# Altium PCB PCB1_DEC22.pcbdoc (part 1 of 2)
Units mil, origin at the board's own origin, x right, y up, seen from the top; angles counter-clockwise.
Board outline 3265 x 2215 mil, 2 copper layers (Top Layer, Bottom Layer); 80 components, 60 nets, 287 pads, 93 vias.
Unrouted connection lines stored in the file: 5.
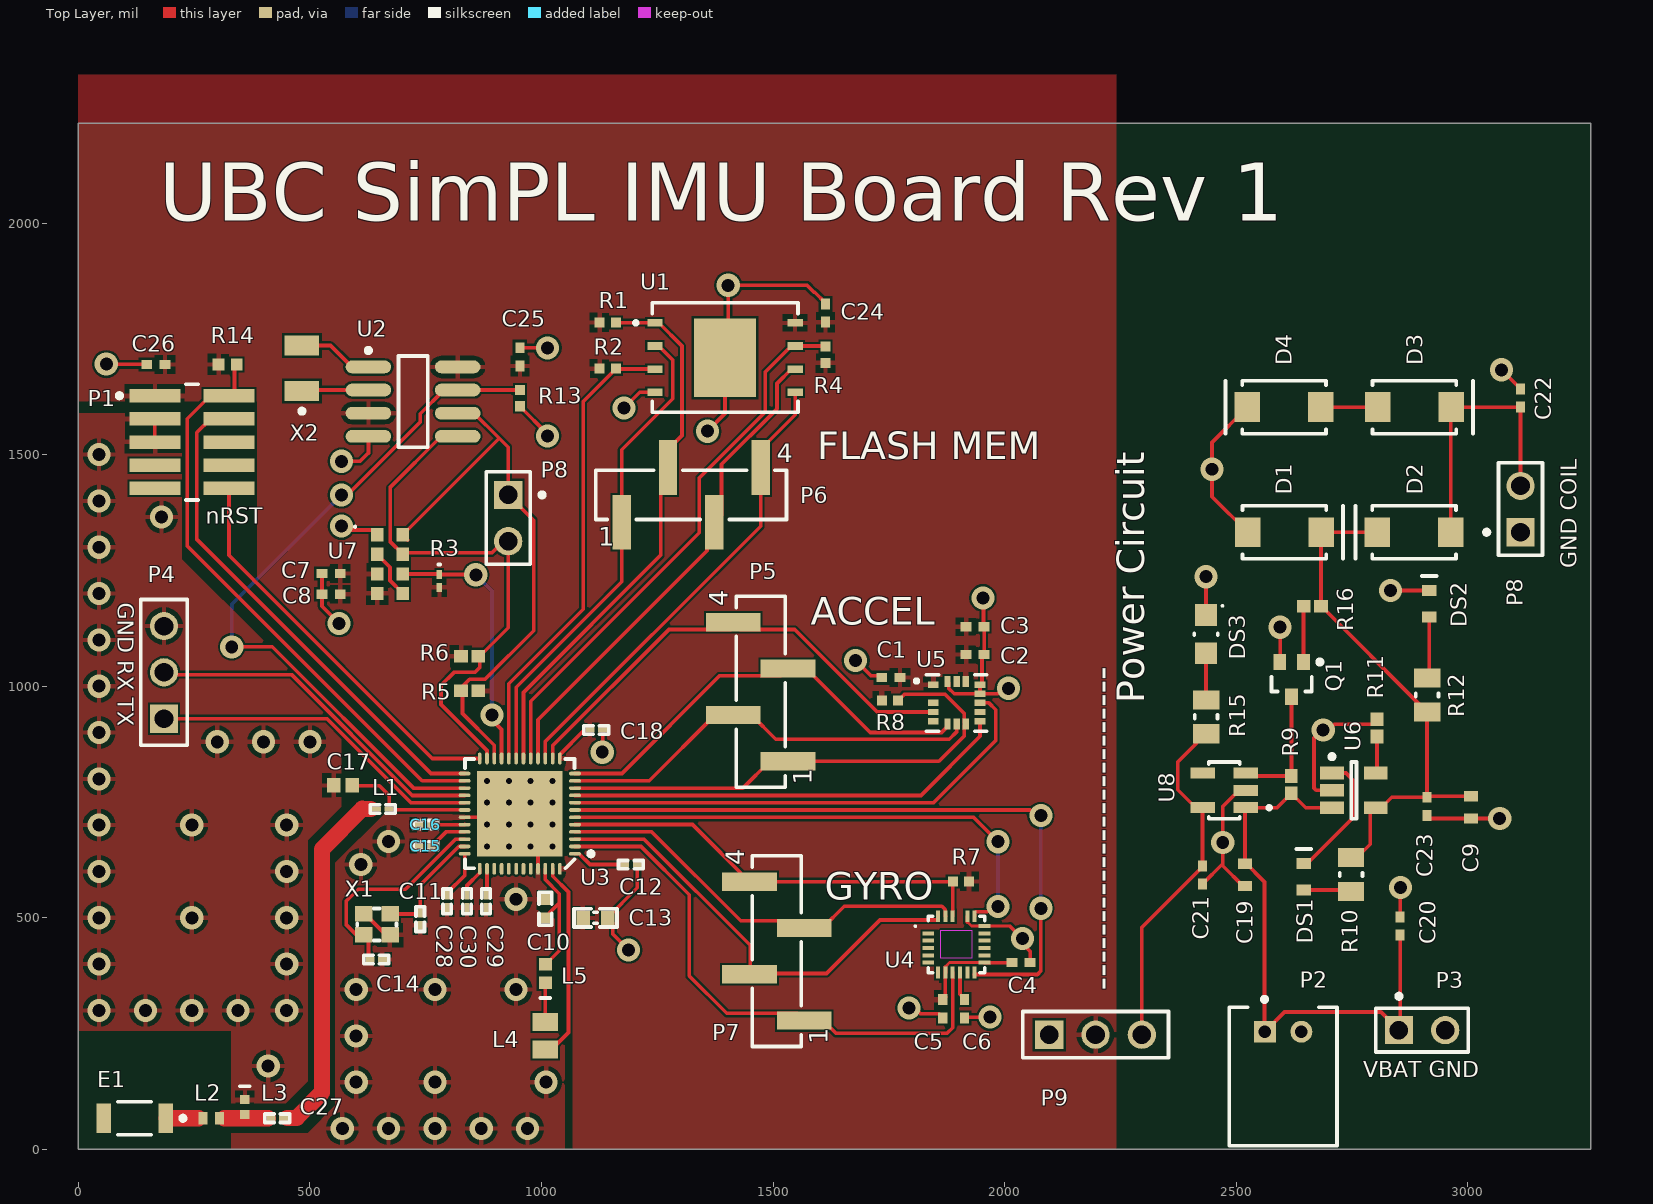
[diagram p0: Top Layer view]
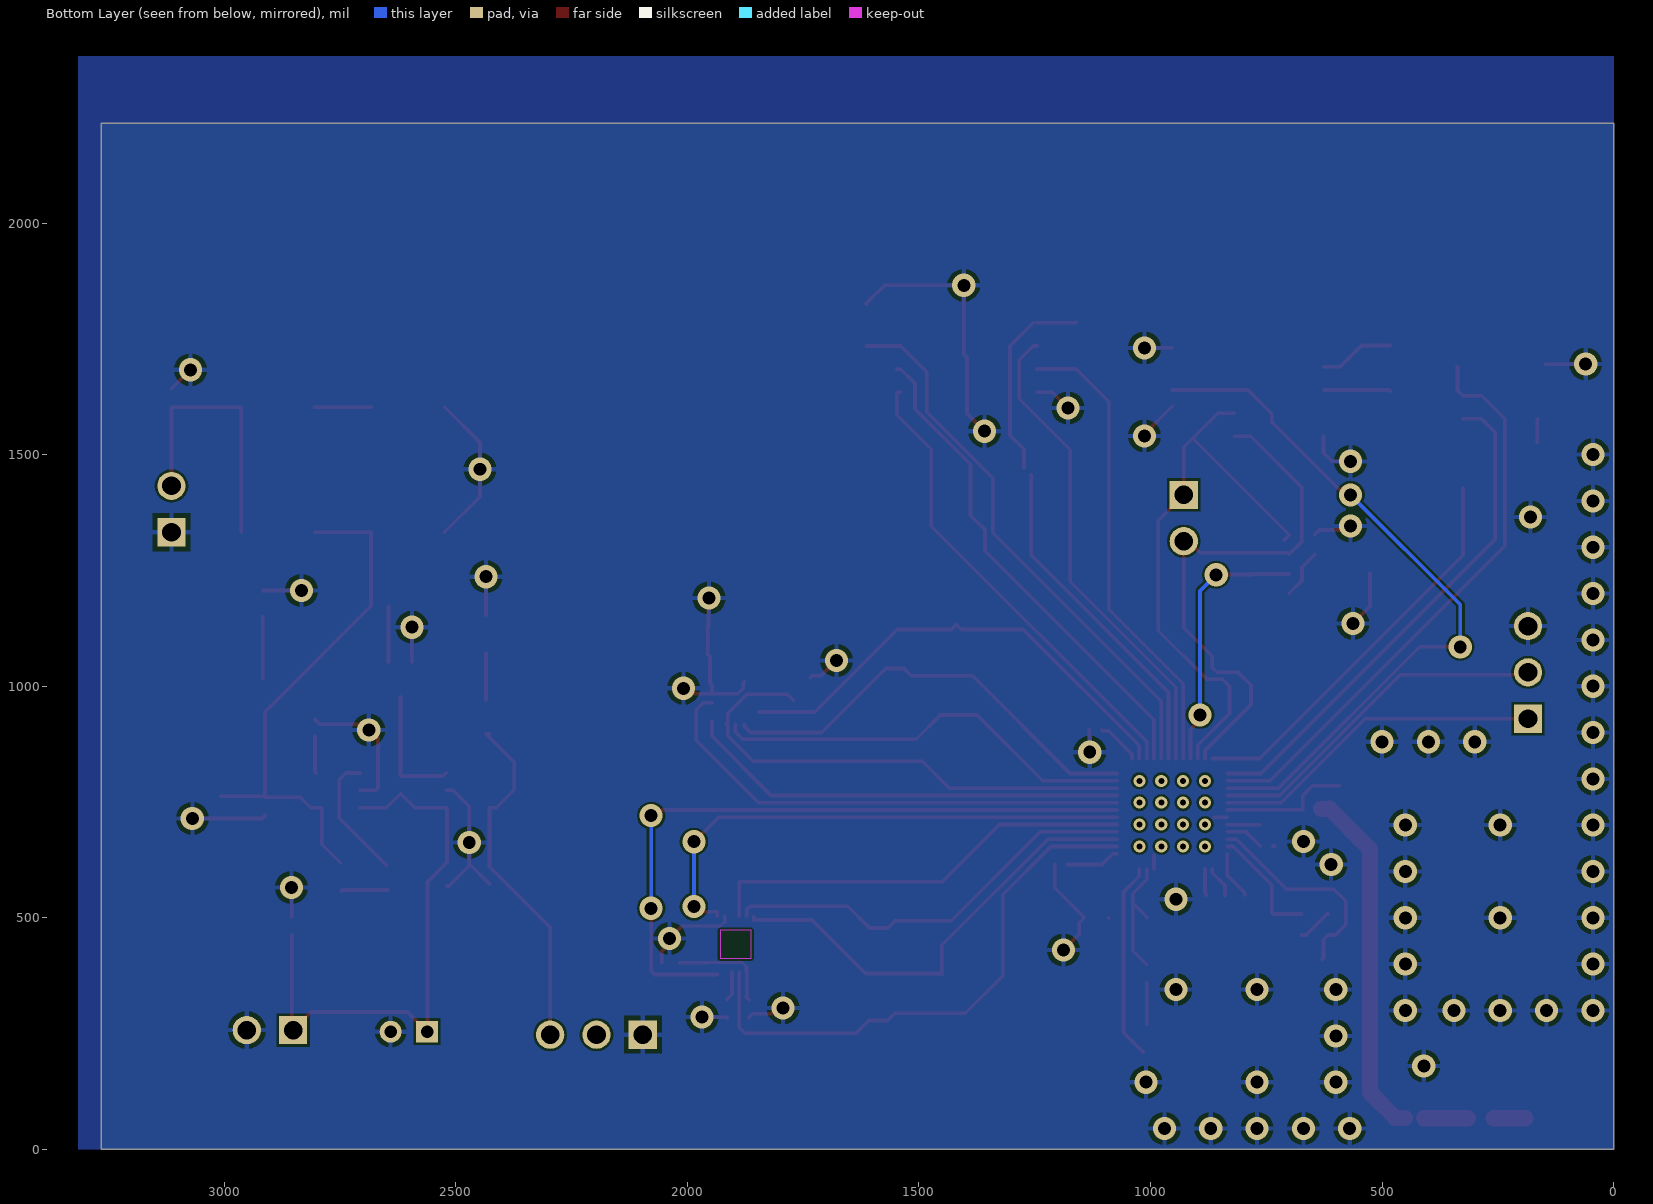
[diagram p1: Bottom Layer view, seen from below]

## Layer stack, top to bottom
Top Solder: solder mask 0.4, Solder Resist, Dk 3.5
Top Layer: signal copper 1.4
Dielectric 1: dielectric 12.6, FR-4, Dk 4.8
Bottom Layer: signal copper 1.4
Bottom Solder: solder mask 0.4, Solder Resist, Dk 3.5

## Board outline
0,2215 3265,2215 3265,0 0,0

## Design rules (kind name [scope] priority, off if disabled: settings)
Clearance [All] p1: gap=5 ignorepadtopadclearanceinfootprint=TRUE
MinimumSolderMaskSliver [All] p1: minsoldermaskwidth=5
PolygonConnect [All] p1: connectstyle=Relief reliefconductorwidth=10 reliefentries=4 polygonreliefangle="90 Angle" airgapwidth=10
RoomDefinition "SimPL_IMU_v1_1 _DEC19" [InComponentClass('SimPL_IMU_v1_1 _DEC19')] p1 off: confinementstyle=ConfineIn formatcopy=TRUE lockcomponents=FALSE outline 7045,1560 13805,1560 13805,2115 7045,2115
RoomDefinition SimPL_IMU_v1_0_DEC19 [InComponentClass('SimPL_IMU_v1_0_DEC19')] p2 off: confinementstyle=ConfineIn formatcopy=TRUE lockcomponents=FALSE outline 3869,956 3869,2956 2869,2956 2869,956
RoutingVias [All] p1: holewidth=28 width=50 viastyle="Through Hole" minholewidth=28 minwidth=50 maxholewidth=28 maxwidth=50
SilkToSilkClearance [All] p1: silktosilkclearance=7
SilkToSolderMaskClearance [IsPad] p1: minsilkscreentomaskgap=5 clearancetoexposedcopper=TRUE
SolderMaskExpansion [All] p1: expansion=4
Width [All] p1: maxlimit=35 minlimit=4 preferedwidth=8 minimp=50.000000 maximp=50.000000 favimp=50.000000
27 further rules are at their usual default settings.

## Classes and differential pairs
component class "SimPL_IMU_v1_1 _DEC19": C10 C11 C12 C13 C14 C15 C16 C17 C18 C24 C25 C26 C27 C28 C29 C30 E1 L1 L2 L3 L4 L5 P1 P4 P5 P6 P7 P8 R1 R2 R4 R5 R6 R13 R14 U1 U2 U3 X1 X2
component class SimPL_IMU_v1_0_DEC19: C1 C2 C3 C4 C5 C6 C7 C8 C9 C19 C20 C22 C23 D1 D2 D3 D4 DS1 DS2 DS3 P2 P3 P8 Q1 R3 R7 R8 R9 R10 R11 R12 R15 R16 U4 U5 U6 U7 U8

## Components (designator, comment, footprint, x,y, rotation, side; value= is the part's Value field where it differs from the comment)
C1 "0.1uF" 0402 1754.41,1018.45 r180 top
C2 "0.1uF" 0402 1935.99,1068.45 r0 top
C3 "1.0uF" 0402 1935.99,1128.45 r0 top
C4 "0.1uF" 0402 2035.4,403.16 r0 top
C5 "0.1uF" 0402 1866.44,303.48 r270 top
C6 "0.1uF" 0402 1913.69,303.48 r270 top
C7 "0.1uF" 0402 545.83,1243.57 r180 top
C8 "2.2uF" 0402 545.92,1198.57 r180 top
C9 "4.7uF" CAPC1005X65X10ML15 3007.01,738.41 r90 top
C10 "1.0µF" CAPC1005X04L 1008.34,519.54 r270 top
C11 "12pF" CAPC0603X03L 738.31,497.02 r90 top
C12 "100nF" CAPC0603X03L 1193.22,614.85 r0 top
C13 "4.7µF" CAPC1608X06L 1116.64,499.85 r0 top
C14 "12pF" CAPC0603X03L 643.31,409.85 r180 top
C15 "100pF" CAPC0603X03L 749.31,654.85 r180 top
C16 "100pF" CAPC0603X03L 749.22,701.04 r0 top
C17 "0.8pF" CAPC1006X50X20ML10T10 571.23,785.93 r0 top
C18 "100nF" CAPC0603X03L 1118.31,905.54 r0 top
C19 "4.7uF" CAPC1005X65X10ML15 2518.97,592.54 r90 top
C20 "1uF" 0402 2853.97,482.43 r90 top
C21 "1uF" 0402 2427.32,592.54 r270 top
C22 "6.8nF" 0402 3113.82,1622.43 r90 top
C23 "220uF" 0402 2912.01,740.61 r270 top
C24 "0.1uF" 0402 1613.31,1805.54 r90 top
C25 "2.2uF" 0402 953.31,1711.03 r90 top
C26 "0.1uF" 0402 167.46,1694.47 r180 top
C27 "1.0pF" CAPC0603X03L 429.57,67.24 r0 top
C28 "100nF" CAPC0603X03L 796.31,535.54 r270 top
C29 "12pF" CAPC0603X03L 880.31,535.54 r90 top
C30 "12pF" CAPC0603X03L 839.22,535.54 r90 top
D1 "STPS1H100A" STM-SMA-2_V 2603.97,1332.43 r0 top
D2 "STPS1H100A" STM-SMA-2_V 2883.97,1332.43 r180 top
D3 "STPS1H100A" STM-SMA-2_V 2884.64,1602.43 r0 top
D4 "STPS1H100A" STM-SMA-2_V 2603.31,1602.43 r180 top
DS1 "red LED" VISH-TLMS1000_V 2645.81,588.43 r90 top
DS2 "red LED" VISH-TLMS1000_V 2917.01,1177.78 r90 top
DS3 "LTST-C170KGKT" LTST-LTST-C170KGKT-2_V 2434.82,1112.43 r270 top
E1 "2450AT18A100E" JT-2450AT18A100-2_V 121.5,67.09 r180 top
L1 "3.3nH" INDC0603X03L 657.4,734.86 r180 top
L2 "3.9nH" *INDC1006X60N 287.08,67.09 r180 top
L3 "2.7nH" INDC1005X55X25LL05T10_A 359.57,91.29 r270 top
L4 "10uH" MURA-IND0805_L 1008.34,245.54 r90 top
L5 "15nH" INDC1005X55X25ML05T10_A 1008.34,379.85 r90 top
P1 "10pin header" SMTC-FTSH-105-01-L-DV_V 245.37,1527.15 r270 top
P2 "Battery Header" JST-S2B-PH-K-S_V 2601.22,157.54 r0 top
P3 "2pin header" AMPH-68000-102HLF_V 2901.22,257.54 r0 top
P4 "3pin" SMTC-TSW-103-07-X-S 185,929.86 r90 top
P5 "61000418221" 61000418221 1473.22,988.04 r90 top
P6 "61000418221" 61000418221 1323.22,1413.04 r0 top
P7 "61000418221" 61000418221 1508.22,428.04 r90 top
P8 "2pin header" AMPH-68000-102HLF_V 3113.82,1382.43 r90 top
P8 "2pin header" AMPH-68000-102HLF_V 928.22,1363.04 r270 top
P9 "3pin" SMTC-TSW-103-07-X-S 2096.22,247.54 r0 top
Q1 "BSS138W-7-F" DIOD-SOT323-3_V 2619.51,1014.93 r270 top
R1 "10k" RESC1005X40X25NL05T05 1143.31,1785.54 r180 top
R2 "10k" RESC1005X40X25NL05T05 1143.31,1685.54 r180 top
R3 "8.2k" 0603 779.47,1227.23 r270 top
R4 "10k" RESC1005X40X25NL05T05 1613.31,1715.54 r270 top
R5 "2.2K" RESC1005X40X25ML10T10 845,990 r0 top
R6 "2.2K" RESC1005X40X25ML10T10 845,1064.85 r180 top
R7 "10k" RESC1005X40X25NL05T05 1905.81,578.04 r0 top
R8 "10k" RESC1005X40X25NL05T05 1752.47,968.94 r180 top
R9 "2.2K" RESC1005X40X25ML10T10 2618.97,787.43 r270 top
R10 "330" RESC2013X50X30NL20T20 2747.82,593.43 r90 top
R11 "2.2K" RESC1005X40X25ML10T10 2803.97,910.15 r270 top
R12 "330" RESC2013X50X30NL20T20 2912.01,981.03 r270 top
R13 "1k" RESC1005X40X25NL05T05 953.31,1622.16 r90 top
R14 "100k" RESC1005X40X25ML05T05 322.38,1694.72 r180 top
R15 "330" RESC2013X50X30NL20T20 2434.82,933.84 r270 top
R16 "2.2K" RESC1005X40X25ML10T10 2664.51,1172.43 r0 top
U1 "MT25QL256ABA1EW9-0SIT" *SON127P600X800X80-9N 1396.38,1709.52 r0 top
U2 "DS1388Z-33+T&R" S8+4_M 722.73,1614.44 r0 top
U3 "nRF52832-QFAA" QFN40P600X600X90-48N 953.22,724.85 r180 top
U4 "ICM-20649" *QFN40P300X300X95-24N 1895.81,442.61 r0 top
U5 "ADXL372BCCZ-RL7" *PQFN50P322X300X114-16N 1896.4,964.01 r0 top
U6 "MCP73831T-2ATI/OT" SOT-23-OT5_M 2753.97,775.14 r0 top
U7 "VCNL4040M3OE" *VISHAY_VCNL4040_4X2X1.1 672.88,1263.57 r0 top
U8 "AP2112K-3.3TRG1" *SOT95P285X140-5N 2473.97,775.14 r180 top
X1 "32MHz" BT-XTAL_2016 644.67,485.6 r0 top
X2 "32.768KHz-T" ABRA-ABS07-2_V 482.73,1686.37 r90 top

## Footprints (in the part's own frame and the unit in brackets; to place one, negate y for a bottom-side part, rotate by r counter-clockwise, add the part's x,y. Pads: shape width x height; smd on the part's side, far side on the other; paste and mask are expansions set on the pad)
0402 [mm] "Chip Capacitor, Body 1.0x0.5mm, IPC High Density"
  rect 0.6x0.5 smd: 1(-0.5,0) 2(0.5,0)
  body extent -0.55,-0.3 0.55,0.3, height 1.3
0603 [mm] "Chip Inductor, Body 0.6x0.3mm, IPC High Density"
  rect 0.5x0.3 smd: 1(-0.35,0) 2(0.35,0)
  silkscreen extent -0.9,-0.05 -0.9,0.05, body extent -0.33,-0.18 0.33,0.18, height 0.55
61000418221 [mm] "Pin Header, pitch 2.54 mm, SMD, Vertical, single row, 4p"
  rect 1x3 smd: 1(-3.81,-1.5) 2(-1.27,1.5) 3(1.27,-1.5) 4(3.81,1.5)
  silkscreen extent -5.23,-1.35 5.23,1.34, body extent -5.08,-2.5 5.08,2.5, height 9.33
*INDC1006X60N [mm]
  rect 0.49x0.7 smd: 1(-0.453,0) 2(0.453,0)
*PQFN50P322X300X114-16N [mm]
  rect 0.6x0.35 smd: 1(-1.285,1) 3(-1.285,0) 4(-1.285,-0.5) 5(-1.285,-1) 9(1.285,-1) 10(1.285,-0.5) 11(1.285,0) 12(1.285,0.5) 13(1.285,1)
  rect 0.6x0.35 on Top Overlay: 2(-1.285,0.5)
  rect 0.35x0.6 smd: 6(-0.5,-1.165) 7(0,-1.165) 8(0.5,-1.165) 14(0.5,1.165) 15(0,1.165) 16(-0.5,1.165)
  silkscreen extent -2.3,-1.55 1.65,1.55
*QFN40P300X300X95-24N [mm]
  rect 0.64x0.22 on Top Overlay: 1(-1.545,1)
  rect 0.64x0.22 smd: 2(-1.545,0.6) 3(-1.545,0.2) 4(-1.545,-0.2) 5(-1.545,-0.6) 6(-1.545,-1) 13(1.545,-1) 14(1.545,-0.6) 15(1.545,-0.2) 16(1.545,0.2) 17(1.545,0.6) 18(1.545,1)
  rect 0.22x0.64 smd: 7(-1,-1.545) 8(-0.6,-1.545) 9(-0.2,-1.545) 10(0.2,-1.545) 11(0.6,-1.545) 12(1,-1.545) 19(1,1.545) 20(0.6,1.545) 22(-0.2,1.545) 23(-0.6,1.545) 24(-1,1.545)
  rect 0.22x0.64 on Top Overlay: 21(0.2,1.545)
  Keep-Out Layer region: -0.85,0.77 0.85,0.77 0.85,-0.77 -0.85,-0.77
  Keep-Out Layer region: -0.85,0.77 0.85,0.77 0.85,-0.77 -0.85,-0.77
  Keep-Out Layer region: -0.85,0.77 0.85,0.77 0.85,-0.77 -0.85,-0.77
  Keep-Out Layer region: -0.85,0.77 0.85,0.77 0.85,-0.77 -0.85,-0.77
  Keep-Out Layer region: -0.85,0.77 0.85,0.77 0.85,-0.77 -0.85,-0.77
  Keep-Out Layer region: -0.85,0.77 0.85,0.77 0.85,-0.77 -0.85,-0.77
  silkscreen extent -2.3,-1.55 1.55,1.55
*SON127P600X800X80-9N [mm]
  rect 0.84x0.42 smd: 1(-3.845,1.905) 2(-3.845,0.635) 3(-3.845,-0.635) 4(-3.845,-1.905) 5(3.845,-1.905) 6(3.845,-0.635) 7(3.845,0.635) 8(3.845,1.905)
  rect 3.4x4.3 smd: 9(0,0)
  silkscreen extent -4.99,-3 4,3
*SOT95P285X140-5N [mm]
  rect 1.35x0.6 smd: 1(-1.185,0.95) 2(-1.185,0) 3(-1.185,-0.95) 4(1.185,-0.95) 5(1.185,0.95)
  silkscreen extent -2.57,-1.55 0.85,1.55
*VISHAY_VCNL4040_4X2X1.1 [mm]
  rect 0.7x0.725 smd: 1(-0.7,1.612) 2(-0.7,0.538) 3(-0.7,-0.537) 4(-0.7,-1.613) 5(0.7,-1.613) 6(0.7,-0.537) 7(0.7,0.538) 8(0.7,1.612)
  silkscreen extent -1.96,2 -1.86,2.1
ABRA-ABS07-2_V [mm] "Hand Drawn, 2-Leads, Body 3.2x1.5mm, Pitch 2.5mm"
  rect 1.1x1.9 smd: 1(-1.25,0) 2(1.25,0)
  silkscreen extent -2.47,-0.13 -2.23,0.12, body extent -1.6,-0.75 1.6,0.75, height 0.9
AMPH-68000-102HLF_V [mm] "THD, 2-Leads, Body 5.08x2.41mm, Pitch 2.54mm"
  rect 1.55x1.55 hole 1.02: 1(-1.27,0)
  round 1.55 hole 1.02: 2(1.27,0)
  silkscreen extent -2.54,-1.2 2.54,1.98, body extent -2.54,-1.2 2.54,1.2, height 8.38
BT-XTAL_2016 [mm]
  rect 0.95x0.85 smd: 1(-0.725,-0.575) 2(0.725,-0.575) 3(0.725,0.575) 4(-0.725,0.575)
  silkscreen extent -1.08,-0.88 1.08,0.88, body extent -1.05,-0.85 1.05,0.85, height 0.56
CAPC0603X03L [mm]
  rect 0.5x0.3 smd: 1(-0.35,0) 2(0.35,0)
  silkscreen extent -0.68,-0.23 0.68,0.23, body extent -0.3,-0.15 0.31,0.15, height 0.3
CAPC1005X04L [mm]
  rect 0.6x0.5 smd: 1(-0.5,0) 2(0.5,0)
  silkscreen extent -0.9,-0.35 0.9,0.35, body extent -0.51,-0.25 0.51,0.25, height 0.5
CAPC1005X65X10ML15 [mm] "Chip Capacitor, 2-Leads, Body 1.15x0.65mm, IPC Low Density"
  rect 0.56x0.78 smd: 1(-0.61,0) 2(0.61,0)
  body extent -0.57,-0.33 0.58,0.32, height 0.65
CAPC1006X50X20ML10T10 [mm] "Chip Capacitor, 2-Leads, Body 1.00x0.55mm, IPC Low Density"
  rect 0.74x0.8 smd: 1(-0.51,0) 2(0.51,0)
  body extent -0.55,-0.33 0.55,0.32, height 0.5
CAPC1608X06L [mm]
  rect 0.75x0.8 smd: 1(-0.675,0) 2(0.675,0)
  silkscreen extent -1.17,-0.5 1.17,0.5, body extent -0.8,-0.43 0.8,0.43, height 0.8
DIOD-SOT323-3_V [mm] "SOT323, 3-Leads, Body 2.2x1.35mm, Pitch 0.65mm"
  rect 0.9x0.7 smd: 1(-0.95,0.65) 2(-0.95,-0.65) 3(0.95,0)
  silkscreen extent -1.07,-1.1 0.67,1.68, body extent -1.1,-1.1 1.1,1.1, height 1.07
INDC0603X03L [mm]
  rect 0.5x0.3 smd: 1(-0.35,0) 2(0.35,0)
  silkscreen extent -0.68,-0.23 0.68,0.23, body extent -0.31,-0.16 0.31,0.16, height 0.26
INDC1005X55X25LL05T10_A [mm] "Chip Inductor, 2-Leads, Body 1.05x0.55mm, IPC High Density"
  rect 0.49x0.52 smd: 1(-0.405,0) 2(0.405,0)
  silkscreen extent -1.15,-0.27 -1.15,0.27, body extent -0.52,-0.28 0.53,0.28, height 0.55
INDC1005X55X25ML05T10_A [mm] "Chip Inductor, 2-Leads, Body 1.05x0.55mm, IPC Low Density"
  rect 0.69x0.72 smd: 1(-0.505,0) 2(0.505,0)
  silkscreen extent -1.35,-0.27 -1.35,0.27, body extent -0.52,-0.28 0.53,0.28, height 0.55
JST-S2B-PH-K-S_V [mm] "THD, 2-Leads, Body 7.6x5.9mm, Pitch 2mm"
  rect 1.2x1.2 hole 0.7: 1(-1,2.45)
  round 1.2 hole 0.7: 2(1,2.45)
  silkscreen extent -2.95,-3.8 2.95,4.35, body extent -2.95,-3.8 2.95,3.8, height 4.8
JT-2450AT18A100-2_V [mm] "Chip Antenna, 2-Leads, Body 3.4x1.8mm"
  rect 0.8x1.6 smd: 1(-1.7,0) 2(1.7,0)
  silkscreen extent -2.78,-0.9 0.91,0.9, body extent -1.7,-0.9 1.7,0.9, height 1.4
LTST-LTST-C170KGKT-2_V [mm] "SMD, 2-Leads, Body 2.00x1.25mm"
  rect 1.2x1.2 smd: 1(-1.05,0) 2(1.05,0)
  silkscreen extent -1.6,-0.65 0.05,0.95, body extent -1,-0.63 1,0.63, height 1.1
MURA-IND0805_L [mm] "Chip Inductor, 2-Leads, Body 2.2x1.45mm, IPC High Density"
  rect 0.99x1.39 smd: 1(-0.755,0) 2(0.755,0)
  body extent -1.1,-0.72 1.1,0.72, height 1.45
QFN40P600X600X90-48N [mm]
  oval 0.65x0.2 smd: 1(-3.025,2.2) 2(-3.025,1.8) 3(-3.025,1.4) 4(-3.025,1) 5(-3.025,0.6) 6(-3.025,0.2) 7(-3.025,-0.2) 8(-3.025,-0.6) 9(-3.025,-1) 10(-3.025,-1.4) 11(-3.025,-1.8) 12(-3.025,-2.2) 25(3.025,-2.2) 26(3.025,-1.8) 27(3.025,-1.4) 28(3.025,-1) 29(3.025,-0.6) 30(3.025,-0.2) 31(3.025,0.2) 32(3.025,0.6) 33(3.025,1) 34(3.025,1.4) 35(3.025,1.8) 36(3.025,2.2)
  oval 0.2x0.65 smd: 13(-2.2,-3.025) 14(-1.8,-3.025) 15(-1.4,-3.025) 16(-1,-3.025) 17(-0.6,-3.025) 18(-0.2,-3.025) 19(0.2,-3.025) 20(0.6,-3.025) 21(1,-3.025) 22(1.4,-3.025) 23(1.8,-3.025) 24(2.2,-3.025) 37(2.2,3.025) 38(1.8,3.025) 39(1.4,3.025) 40(1,3.025) 41(0.6,3.025) 42(0.2,3.025) 43(-0.2,3.025) 44(-0.6,3.025) 45(-1,3.025) 46(-1.4,3.025) 47(-1.8,3.025) 48(-2.2,3.025)
  rect 4.7x4.7 smd: 49(0,0)
  silkscreen extent -4.03,-3 3,3, body extent -3.02,-3.02 3.02,3.02, height 0.86
RESC1005X40X25ML05T05 [mm] "Chip Resistor, 2-Leads, Body 1.05x0.55mm, IPC Low Density"
  rect 0.65x0.65 smd: 1(-0.5,0) 2(0.5,0)
  body extent -0.53,-0.28 0.53,0.28, height 0.4
RESC1005X40X25ML10T10 [mm] "Chip Resistor, 2-Leads, Body 1.00x0.50mm, IPC Low Density"
  rect 0.75x0.7 smd: 1(-0.475,0) 2(0.475,0)
  body extent -0.55,-0.3 0.55,0.3, height 0.4
RESC1005X40X25NL05T05 [mm] "Chip Resistor, 2-Leads, Body 1.05x0.55mm, IPC Medium Density"
  rect 0.55x0.55 smd: 1(-0.45,0) 2(0.45,0)
  body extent -0.53,-0.28 0.53,0.28, height 0.4
RESC2013X50X30NL20T20 [mm] "Chip Resistor, 2-Leads, Body 2.00x1.25mm, IPC Medium Density"
  rect 1.05x1.45 smd: 1(-0.925,0) 2(0.925,0)
  silkscreen extent -0.1,-0.62 0.1,0.63, body extent -1.1,-0.72 1.1,0.72, height 0.5
S8+4_M [mm] "SOIC, 8-Leads, Body 4.9x3.9mm, Pitch 1.27mm, IPC Low Density"
  oval 2.5x0.7 smd: 1(-2.45,1.905) 2(-2.45,0.635) 3(-2.45,-0.635) 4(-2.45,-1.905) 5(2.45,-1.905) 6(2.45,-0.635) 7(2.45,0.635) 8(2.45,1.905)
  silkscreen extent -2.57,-2.5 0.8,2.93, body extent -2,-2.5 2,2.5, height 1.75
SMTC-FTSH-105-01-L-DV_V [mm] "CONN, 10-Leads, Body 6.35x3.43mm, Pitch 1.27mm"
  rect 0.74x2.79 smd: 1(-2.54,-2.035) 2(-2.54,2.035) 3(-1.27,-2.035) 4(-1.27,2.035) 5(0,-2.035) 6(0,2.035) 7(1.27,-2.035) 8(1.27,2.035) 9(2.54,-2.035) 10(2.54,2.035)
  silkscreen extent -3.18,-4.1 3.17,0.34, body extent -3.17,-2.92 3.18,2.92, height 5.96
SMTC-TSW-103-07-X-S [mm] ".025 SQ Post Terminal Strip Assembly, 1x3 Pins, Vertical, 2.54mm Pitch, Male"
  rect 1.55x1.55 hole 1.02: 1(0,0)
  round 1.55 hole 1.02: 2(2.54,0) 3(5.08,0)
  silkscreen extent -1.46,-1.27 6.54,1.27, body extent -1.27,-1.27 6.35,1.27, height 8.38
SOT-23-OT5_M [mm] "SOT23, 5-Leads, Body 2.9x1.7mm, Pitch 0.95mm, Lead Span 2.8mm, IPC Low Density"
  rect 1.3x0.7 smd: 1(-1.2,0.95) 2(-1.2,0) 3(-1.2,-0.95) 4(1.2,-0.95) 5(1.2,0.95)
  silkscreen extent -1.32,-1.55 0.15,1.97, body extent -0.9,-1.55 0.9,1.55, height 1.45
STM-SMA-2_V [mm] "Diode, 2-Leads, Body 4.6x2.9mm"
  rect 1.4x1.64 smd: 1(-2.015,0) 2(2.015,0)
  silkscreen extent -2.3,-1.45 3.22,1.45, body extent -2.3,-1.45 2.3,1.45, height 2.59
VISH-TLMS1000_V [mm] "SMD, 2-Leads, Body 0.8x1.6mm"
  rect 0.6x0.8 smd: 1(-0.725,0) 2(0.725,0)
  silkscreen extent 1.52,-0.4 1.52,0.4, body extent -0.8,-0.4 0.8,0.4, height 0.65

## Part data
C1 C2 C4 C5 C6 C7 C8 C20 C21 C22 C23 C24 C25 C26: library part 0.1UF-0402-16V-10%, "0.1µF ceramic capacitors    A capacitor is a passive two-terminal electrical component used to store electrical energy temporarily in an electric field.", DeviceName=-0402-16V-10%, DeviceSetName=0.1UF, GateName_1=G$1, LibraryName=SparkFun-Capacitors, PROD_ID=CAP-12416, SymbolName_1=CAP
C3: library part 1.0UF-0402-16V-10%, "1µF ceramic capacitors    A capacitor is a passive two-terminal electrical component used to store electrical energy temporarily in an electric field.", DeviceName=-0402-16V-10%, DeviceSetName=1.0UF, GateName_1=G$1, LibraryName=SparkFun-Capacitors, PROD_ID=CAP-12417, SymbolName_1=CAP
C9 C19: library part CMP-2000-05438-1, "Chip Capacitor, 4.7 uF, +/- 20%, 10 V, -55 to 85 degC, 0402 (1005 Metric), RoHS, Tape and Reel", Capacitance=4.7µF, Manufacturer=TDK, Operating Temperature=-55degC~85degC, Package / Case=0402(1005Metric), PCN Part Number=MLCCPartNumberChange30/Nov/2012, Ratings=-, Standard Package=1, Temperature Coefficient=X5R, Tolerance=±20%, Voltage - Rated=10V, Applications=GeneralPurpose, Category=Capacitors, Datasheet URL=https://datasheet.ciiva.com/24216/c1005x5r1a475m050bc-264317-24216438.pdf, Datasheet Version=Sep-13, Family=CeramicCapacitors, Features=-, Height - Seated (Max)=-, Kits=445-9021-KIT-ND-KITMLCC100PF-10UF04026.3-50V445-9003-KIT-ND-KITCAPCERHICAPMLCCSMD, Lead Spacing=-, Lead Style=-, Manufacturer URL=http://www.tdk.com/, Mounting Type=SurfaceMount,MLCC, Online Catalog=CSeries,GeneralPurpose, Other Names=445-8023-1, Packaging=CutTape(CT), Product Training Modules=CSeriesGeneralApplicationsSEAT,CCV,andTVCLDesignToolsGuidetoReplacinganElectrolyticCapacitorwithanMLCC, RoHS Information=RoHSCertificate-MLCC, Series=C, Size / Dimension="0.039\"Lx0.020\"W(1.00mmx0.50mm)", Thickness (Max)=-
C10: library part C0402-1µ0, "Capacitor, X5R, ±5%", Artikkelnr Noca=20039235, Artikkelnr Simpro=N.A., Footprint Doc=0402, LatestRevisionDate=2009-11-23, Note=6.3V, Part Number=C0402-1µ0, Pin Count=2, Published=2009-05-08, Publisher="Nordic Semiconductor"
C11 C14 C29 C30: library part C0201-12p, "Capacitor, NP0, ±2%", Artikkelnr Noca=N.A., Artikkelnr Simpro=N.A., Footprint Doc=0201, LatestRevisionDate=2014-11-13, Note=50V, Part Number=C0201-12p, Pin Count=2, Published=2014-11-13, Publisher="Nordic Semiconductor"
C12 C18 C28: library part C0201-100n, "Capacitor, X7R, ±10%", Artikkelnr Noca=N.A., Artikkelnr Simpro=N.A., Footprint Doc=0201, LatestRevisionDate=2014-11-13, Note=16V, Part Number=C0201-100n, Pin Count=2, Published=2014-11-13, Publisher="Nordic Semiconductor"
C13: library part C0603-4µ7, "Capacitor, X5R, ±10%", Artikkelnr Noca=20069060, Artikkelnr Simpro=N.A., Footprint Doc=0603, LatestRevisionDate=2009-11-23, Note=6.3V, Part Number=C0603-4µ7, Pin Count=2, Published=2009-05-08, Publisher="Nordic Semiconductor"
C15 C16: library part C0201-100p, "Capacitor, NP0, ±5%", Artikkelnr Noca=N.A., Artikkelnr Simpro=N.A., Footprint Doc=0201, LatestRevisionDate=2014-11-13, Note="Chip Cap 1%", Part Number=C0201-100p, Pin Count=2, Published=2014-11-13, Publisher="Nordic Semiconductor"
C17: library part CMP-2008-04732-1, Manufacturer="AVX Interconnect / Elco", Part Number=04023J0R8PBSTR
C27: library part C0201-1.0p, "Capacitor, NP0, ±5%", Artikkelnr Noca=N.A., Artikkelnr Simpro=N.A., Footprint Doc=0201, LatestRevisionDate=2014-11-13, Note="Chip Cap 1%", Part Number=C0201-1.0p, Pin Count=2, Published=2014-11-13, Publisher="Nordic Semiconductor"
D1 D2 D3 D4: library part CMP-2000-07173-1, "High Voltage Power Schottky Rectifier, 1 A, 100 V, 2-Pin SMD (SMA), RoHS, Tape and Reel", Capacitance @ Vr, F=-, Current - Average Rectified (Io)=1A, Current - Reverse Leakage @ Vr=4µA@100V, Manufacturer=STMicroelectronics, Operating Temperature - Junction=175°C(Max), Package / Case=DO-214AC,SMA, Package Description="2-Pin Surface Mount Device, Body 4.275 x 2.575 mm", Package Reference=SMA, Standard Package=1, Supplier Device Package=SMA(DO-214AC), Voltage - DC Reverse (Vr) (Max)=100V, Voltage - Forward (Vf) (Max) @ If=770mV@1A, Category=DiscreteSemiconductorProducts, Datasheet URL=http://www.st.com/content/ccc/resource/technical/document/datasheet/e8/3c/6a/07/72/b0/40/88/CD00001304.pdf/files/CD00001304.pdf/jcr:content/translations/en.CD00001304.pdf, Datasheet Version=09/2008, Diode Type=Schottky, Family=Diodes,Rectifiers-Single, Kits=497-8006B-KIT-ND-KITSCHOTTKYDIODE11VALUES5EA, Manufacturer URL=http://www.st.com/, Mounting Technology=SurfaceMount, Mounting Type=SurfaceMount, Online Catalog=SchottkyDiode, Other Names=497-3209-1, Other Related Documents=STPS1H100ViewAllSpecifications, Package URL=http://www.st.com/st-web-ui/static/active/en/resource/technical/document/datasheet/CD00283518.pdf, Packaging=CutTape(CT), Reverse Recovery Time (trr)=-, Series=-, Speed=FastRecovery=200mA(Io)
DS1 DS2: library part CMP-2000-07254-1, "Low Current LED, 40 mW, 1.8 V, -40 to 100 degC, 2-Pin SMD (0603), RoHS, Tape and Reel", Forward Current If=2mA, Forward Voltage=1.8V, LED Colour=Red, Manufacturer=Vishay, Package Description="2-Pin Surface Mount Device, Body 1.6 x 0.8 mm", Package Reference=TLMS1000, Automotive Qualification Standard=AEC-Q100, Bulb Size=1.6mmx0.8mm, Datasheet URL=https://datasheet.ciiva.com/5798/1698881-5798337.pdf, Datasheet Version="Rev. 1.7, 02/2011", LED Mounting=SMD, Lens Shape=Rectangular, Luminous Intensity=4mcd, Manufacturer URL=http://www.vishay.com/, Mounting Technology=SurfaceMount, MSL=MSL2-1year, Packaging=CutTape, Product Range=-, SVHC=ToBeAdvised, Viewing Angle=80°, Wavelength Typ=636nm
DS3: library part CMP-2000-06620-1, "Ultra Bright AlInGaP Chip LED, 75 mW, -55 to 85 degC, 2-Pin SMD (0805), RoHS, Tape and Reel", Emitting Color=YellowGreen, Forward Current=30mA, Forward Voltage=2.4V, Manufacturer=Lite-On, Operating Temperature Classification=Industrial, Operating Temp Range=-55Cto85C, Package Description="2-Pin Surface Mounted Device, Body 2 x 1.25 mm", Package Reference=LTST-C170KGKT-2, Package Type=ChipLed, Power Dissipation=75W, Power Dissipation Max=75mW, Reverse Voltage=5V, Test Current (It)=20mA, Chip Material=AlGaInP, Datasheet URL=http://optoelectronics.liteon.com/upload/download/DS22-2000-073/S_110_LTST-C170KGKT.pdf, Datasheet Version="Rev. G, 06/2005", DELETED=Compliant, Dominant Wave Length=571nm, Forward Current Max=30mA, High Brightness=Yes, Lens Dimensions=1.4x1.25x0.6mm, Luminous Intensity=35mcd, Lum Intensity=35mcd, Main Category=ChipLED, Manufacturer URL=http://www.us.liteon.com/, Mounting=SurfaceMount, Mounting Technology=SurfaceMount, Number of  Elements=1, Packaging=TapeandReel, Peak Wavelength=574nm, Pin Count=2, Product Depth (mm)=1.25mm, Product Height (mm)=1.1mm, Product Length (mm)=2mm, Rad Hardened=No, Shape Type=Rectangular, Type=Uni-Color, Viewing Angle=130deg
E1: library part CMP-2000-05167-1, "Ceramic Antenna, 2.45 GHZ, 2 W, -40 to 125 degC, 2-Pin SMD, RoHS, Tape and Reel", Manufacturer="Johanson Technology", Maximum Frequency=2500MHz, Minimum Frequency=2400MHz, Package=2Case18-4, Category=Antenna, Datasheet URL=http://www.johansontechnology.com/datasheets/antennas/2450AT18A100.pdf, Datasheet Version="Rev. 1.3, 07/2014", Manufacturer URL=https://www.johansontechnology.com/, Type=Ceramic, Typical Antenna Gain=0.5dB
L1: library part L0201-3n3, "High frequency chip inductor ±5%", Artikkelnr Noca=N.A., Artikkelnr Simpro=N.A., Footprint Doc=0201, LatestRevisionDate=2013-04-10, Note="High frequency chip inductor ±5%", Part Number=L0201-3n3, Pin Count=2, Published=2013-04-10, Publisher="Nordic Semiconductor"
L2: library part MHQ1005P3N9CT000, "Inductor, 3.9nh, 0.2nh, 0.9a, 0402", Package="1006 TDK", Availability=Unavailable, MF=TDK, MP=MHQ1005P3N9CT000, Price=None, SnapEDA_Link=https://www.snapeda.com/parts/MHQ1005P3N9CT000/TDK/view-part/?ref=snap
L3: library part CMP-2000-06580-1, "Chip Inductor, 2.7 nH, +/- 0.3 nH, 300 mA, -55 to 125 degC, 0402 (1005 Metric), RoHS, Tape and Reel", Current Rating=300mA, DC Resistance (DCR)=150mOhmMax, Frequency - Self Resonant=6GHz, Frequency - Test=100MHz, Manufacturer=Murata, Operating Temperature=-55°C~125°C, Package / Case=0402(1005Metric), Package Description="2-Pin Surface Mount Device, Body 1 x 0.5 mm", Package Reference=0402, Q @ Freq=8@100MHz, Standard Package=10,000, Tolerance=±0.3nH, Catalog Drawings=LQG15HSSeriesTopLQG15HSSeriesEnd, Category=Inductors,Coils,Chokes, Datasheet URL=http://search.murata.co.jp/Ceramy/image/img/PDF/ENG/L0075S0083LQG15HS.pdf, Datasheet Version=09/2010, Family=FixedInductors, Height - Seated (Max)="0.022\"(0.55mm)", Inductance=2.7nH, Manufacturer URL=http://www.murata.com/, Material - Core=Air, Mounting Technology=SurfaceMount, Mounting Type=SurfaceMount, Online Catalog=LQG15HxSeries, Other Names=490-2615-2, Packaging=Tape&Reel(TR), Product Training Modules=InductorProducts, Series=LQG15HS, Shielding=Unshielded, Size / Dimension="0.039\"Lx0.020\"W(1.00mmx0.50mm)", Type=Multilayer
L4: library part CMP-2000-06587-1, "Fixed Inductor, 10 uH, +/-20%, -55 to 125 degC, 2-Pin SMD (0805), RoHS, Tape and Reel", Case Size/Dimension=0805, DC Resistance=0.6, Inductance-Nom=10H, Manufacturer=Murata, Package Description="2-Pin Surface Mount Device, Body 2 x 1.25 mm", Package Reference=IND0805, Rated Current-Max=100mA, Tolerance (%)=20%, Datasheet URL=http://psearch.en.murata.com/inductor/product/LQM21FN100M70%23.pdf, Datasheet Version=05/2016, Manufacturer URL=http://www.murata.com/, Mounting Technology=SurfaceMount
L5: library part CMP-2100-03652-1, "Chip Inductor, 15 nH, +/- 5%, 100 MHz, -55 to 125 degC, 0402 (1005 Metric), RoHS, Paper Tape", Case/Package=0402, Case Code (Metric)=1005, Current Rating=300mA, DC Resistance (DCR)=320mOhm, Inductance=15nh, Manufacturer=Murata, Max Operating Temperature=125degC, Min Operating Temperature=-55degC, Package Description="2-Pin Surface Mount Device, Body 1 x 0.5 mm", Package Quantity=10000, Self Resonant Frequency=2.5GHz, Test Frequency=100MHz, Tolerance=5%, Case Code (Imperial)=0402, Core Material=Air, Datasheet URL=http://psearch.en.murata.com/inductor/product/LQG15HS15NJ02_.pdf, Datasheet Version=42675.0, DC Current=300mA, Depth=0.55mm, Height=0.5mm, Height - Seated (Max)=0.022inch, Lead Free=LeadFree, Length=1mm, Manufacturer URL=http://www.murata.com/, Max DC Current=300mA, Military Standard=Not, Package Reference=0402, Packaging=TapeandReel, Q Factor=8, Radiation Hardening=No, RoHSCompliant=true, Shielding=Unshielded, Termination=SMD/SMT, Width=0.02inch
P1: library part CMP-2000-05354-1, "Male Header, Pitch 1.27 mm, 2 x 5 Position, Height 5.96 mm, -55 to 125 degC, RoHS, Bulk", Color=Black, Manufacturer=Samtec, Standard Package=1, Catalog Drawings=FTSHSeriesFTSHSeriesSMTSide, Category=Connectors,Interconnects, Connector Type=Header,Unshrouded, Contact Finish=Gold, Contact Finish Thickness=10µin(0.25µm), Contact Mating Length="0.120\"(3.05mm)", Contact Type=MalePin, Datasheet URL=https://datasheet.ciiva.com/30493/0900766b80adfe36-30493006.pdf, Datasheet Version=Feb-08, EDA / CAD Models=DownloadfromAcceleratedDesigns, Family=RectangularConnectors-Headers,MalePins, Fastening Type=-, Featured Product=Board-To-BoardInterconnectSystems, Features=-, Manufacturer URL=http://www.samtec.com/, Mating Products="FLE-105-01-G-DV-TR-ND-CONNSKT1.27MM10POSDUALSMDCLP-105-02-G-D-P-TR-ND-CONNRCPT10POSDUAL.05\"SMDSFMC-105-L2-S-D-TR-ND-CONN.05\"SURFACE10POSSMTSFMH-105-02-L-D-TR-ND-CONNRECEPT10POS.50\"SMTFLE-105-01-G-DV-A-ND-CONNSKT1.27MM10POSDUALSMDCLP-105-02-G-D-BE-ND-CONNRCPT10POSDUAL.05\"SMDFLE-105-01-G-DV-A-P-ND-CONNSKT1.27MM10POSDUALSMDSAM1153-05-ND-CONNRCPT10POSDUAL.05\"SMDSAM1155-05-ND-CONNRCPT10POSDUAL.05\"SMDSAM1154-05-ND-CONNRCPT10POSDUAL.05\"SMDSFMH-105-02-L-D-LC-ND-CONNRECEPT10POS.50\"SMTSAM1226-05-ND-CONNRCPT.05\"10POSDUALSMD", Mounting Type=SurfaceMount, Number of Positions=10, Number of Positions Loaded=All, Number of Rows=2, Online Catalog=FTSHSeries, Other Names=SAM1161-05, Packaging=Bulk, Pitch="0.050\"(1.27mm)", Product Training Modules=Board-to-BoardConnectors, Row Spacing="0.050\"(1.27mm)", Series=FTSH, Termination=Solder
P2: library part CMP-1755-00004-1, "Male Header, Pitch 2 mm, 1 x 2 Position, Height 4.8 mm, Tail Length 3.4 mm, -25 to 85 degC, RoHS, Bulk", Capacitance="10 uF", Case\Package=Radial, Max Operating Temperature="85 degC", Min Operating Temperature="-40 degC", Package Quantity=200, Tolerance=20%, Voltage Rating="50 V", ComponentLink1Description=Datasheet, ComponentLink1URL=http://www.jst-mfg.com/product/pdf/eng/ePH.pdf, DatasheetVersion=Dec-12, Diameter="5 mm", Height="11 mm", Lead Pitch="2 mm", Length="11 mm", Mount="Through Hole", PackageDescription="Male Header, Pitch 2 mm, 1 x 2 Position, Height 4.8 mm, Tail Length 3.4 mm", PackageReference=S2B-PH-K-S, Packaging=Bulk, Pins=2, Radiation Hardening=No, REACH SVHC="No SVHC", RoHSCompliant=true, Voltage Rating (DC)="50 V"
P3 P8 P8: library part CMP-2000-05666-1, "Male Header, Pitch 2.54 mm, 1 x 2 Position, Height 8.38 mm, Tail Length 2.41 mm, RoHS, Bulk", Current Rating=3A, Flammability Rating=UL94V-0, Insulation Resistance=5000MOhms, Manufacturer=FCI, Operating Temperature Range=-65Cto+125C, Package Description="Male Header, Pitch 2.54 mm, 1 x 2 Position, Height 8.38 mm, Tail Length 2.41 mm", Package Reference=68000-102HLF, Voltage Rating=1.5kV, Brand=FCI, Contact Gender=Pin(Male), Contact Material=PhosphorBronze, Contact Plating=Gold/GTX, Datasheet URL=https://datasheet.ciiva.com/5149/68000-274228-5149165.pdf, Datasheet Version="Rev. F, 04/2006", Factory Pack Quantity=100, Housing Material=Thermoplastic, Manufacturer URL=http://www.amphenol.com/, Mating Post Length=5.84mm, Mounting Angle=Vertical, Mounting Style=ThroughHole, Mounting Technology=ThroughHole, Number of Positions=2, Number of Positions / Contacts=2, Number of Rows=1, Packaging=Bulk, Pitch=2.54mm, Product Category=Headers&WireHousings, Product Type=Headers, RoHS=Details, Series=68000, Termination Post Length=2.41mm, Termination Style=ThroughHole, Type=Unshrouded
P4 P9: library part CMP-1024-00333-1, "0.025\" SQ Post Header, Through-hole, Vertical, -55 to 125 degC, 2.54 mm Pitch, 3-Pin, Male, RoHS", Manufacturer=Samtec, PartNumber=TSW-103-07-G-S, Temperature Range="-55 to 125 degC", ComponentLink1Description="Manufacturer URL", ComponentLink1URL=http://www.samtec.com, ComponentLink2Description=Datasheet, ComponentLink2URL=http://www.samtec.com/documents/webfiles/pdf/TSW_TH.PDF, ComponentLink3Description="Package Specification", ComponentLink3URL=http://www.samtec.com/documents/webfiles/cpdf/TSW-XXX-XX-XXX-X-XX-XXX-MKT.pdf, DatasheetVersion=F-214, Mounting Technology=Through-hole, Orientation=Vertical, PackageDescription=".025[0.64] SQ. Post Terminal Strip Assembly", PackageReference=TSW-103-07-X-S, PackageVersion="DM, 8/1988", Pitch="2.54 mm", RoHS=True
P5 P6 P7: library part CMP-1502-01019-1, "SMT Vertical Pin Header WR-PHD, Pitch 2.54 mm, Single Row, 4 pins", Contact Resistance=20mOhm, Manufacturer="Wurth Elektronik", Operating Temperature=-40to125degC, Rated Current=3A, Withstanding Voltage=500VAC, Working Voltage=250VAC, Datasheet URL=https://katalog.we-online.de/em/datasheet/6100xx18221.pdf, Gender=Male, Manufacturer URL=http://www.we-online.de, Mounting Technology=SMT, Orientation=Vertical, Package Reference=61000418221, Packaging=Tube, Part Number=61000418221, Pin Number=4, Pitch=2.54mm, Publisher=WurthElektronik, Row Number=Single
Q1: library part CMP-2000-05968-1, "N-Channel Enhancement Mode Mosfet, 50 V, 200 mA, -55 to 150 degC, 6-Pin SOT-323, RoHS, Tape and Reel", Id - Continuous Drain Current=200mA, Manufacturer=DiodesIncorporated, Maximum Operating Temperature=+150C, Minimum Operating Temperature=-55C, Package / Case=SOT-323-3, Package Description="3-Pin Small Outline Transistor, Body 2 x 1.25 mm, Pitch 0.65 mm", Package Reference=SOT323, Pd - Power Dissipation=200mW, Rds On - Drain-Source Resistance=1.4Ohms, Vds - Drain-Source Breakdown Voltage=75V, Vgs - Gate-Source Voltage=20V, Brand=DiodesIncorporated, Channel Mode=Enhancement, Configuration=Single, Datasheet URL=http://www.diodes.com/_files/datasheets/ds30206.pdf, Datasheet Version="Rev. 11-2, 09/2013", Factory Pack Quantity=3000, Forward Transconductance - Min=0.1S, Height=1mm, Length=2.2mm, Manufacturer URL=http://www.diodes.com/, Mounting Style=SMD/SMT, Mounting Technology=SurfaceMount, Number of Channels=1Channel, Packaging=Reel, Product=MOSFETSmallSignal, Product Category=MOSFET, RoHS=True, Series=BSS138, Technology=Si, Transistor Polarity=N-Channel, Transistor Type=1N-Channel, Type=EnhancementModeFieldEffectTransistor, Typical Turn-Off Delay Time=20ns, Typical Turn-On Delay Time=20ns, Unit Weight=0.000212oz, Width=1.35mm
R1 R2 R4 R7 R8: library part CMP-2002-00607-3, "Chip Resistor, 10 KOhm, +/- 1%, 100 mW, -55 to 155 degC, 0402 (1005 Metric), RoHS, Tape and Reel", Case\/Package=0402, Case Code (Metric)=1005, Manufacturer="Basic Passives", Max Operating Temperature="155 degC", Min Operating Temperature="-55 degC", Package Quantity=10000, PartNumber=ERJ-2RKF1002X, Power Rating="100 mW", Resistance="10 KOhm", Tolerance=1%, Voltage Rating="50 V", Case Code (Imperial)=0402, ComponentLink1Description="Manufacturer URL", ComponentLink1URL=http://www.panasonic.com/, ComponentLink2Description=Datasheet, ComponentLink2URL=http://industrial.panasonic.com/cdbs/www-data/pdf/RDA0000/AOA0000C86.pdf, DatasheetVersion=04/2015, Height="0.35 mm", Length="1 mm", Mount="Surface Mount", Mounting Technology="Surface Mount", PackageDescription="2-Pin Surface Mount Device, Body 1 x 0.5 mm", PackageReference=0402, Packaging="Tape and Reel", Pins=2, Radiation Hardening=No, REACH SVHC=Yes, RoHSCompliant=true, Width="0.5 mm"
R3: library part 8.2KOHM-0603-1/10W-5%, "8.2kΩ resistor    A resistor is a passive two-terminal electrical component that implements electrical resistance as a circuit element. Resistors act to reduce current flow, and, at the same time, act to lower voltage levels within circuits. - Wikipedia", DeviceName=-0603-1/10W-5%, DeviceSetName=8.2KOHM, GateName_1=G$1, LibraryName=SparkFun-Resistors, PROD_ID=RES-10646, SymbolName_1=RESISTOR
R5 R6 R9 R11 R16: library part CMP-2002-06097-1, Manufacturer=Multicomp, Part Number=MC00625W040212K2
R10 R12 R15: library part CMP-2001-03823-1, Manufacturer="Vishay Dale", Part Number=CRCW0805330RFKEA
R13: library part CMP-2002-08276-1, Manufacturer="Vishay Dale", Part Number=CRCW04021K00FKED
R14: library part CMP-2002-08123-2, "Chip Resistor, 100 KOhm, +/- 1%, 0.63 W, -55 to 155 degC, 0402 (1005 Metric), RoHS, Tape and Reel", Case\Package=0402, Case Code (Metric)=1005, Max Operating Temperature="155 degC", Min Operating Temperature="-55 degC", Package Quantity=10000, Power Rating="63 mW", Resistance="100 kohm", Tolerance=1%, Type (Resistor)="Thick Film", Voltage Rating="50 V", Case Code (Imperial)=0402, ComponentLink1Description="Manufacturer URL", ComponentLink1URL=http://www.vishay.com/, ComponentLink2Description=Datasheet, ComponentLink2URL=http://www.vishay.com/docs/20035/dcrcwe3.pdf, DatasheetVersion=06/2012, Height="0.35 mm", Length="1 mm", Mount="Surface Mount", Mounting Technology="Surface Mount", PackageDescription="2-Pin Surface Mount Device, Body 1 x 0.5 mm", PackageReference=0402, Packaging="Tape and Reel", Pins=2, Radiation Hardening=No, REACH SVHC=Unknown, RoHSCompliant=true, Weight="2.3E-05 oz", Width="0.5 mm"
U1: "NOR Flash Serial-SPI 3.3V 256Mbit 256M x 1bit 8-Pin WPDFN", Package="WDFN-8 Micron Technology", Availability=Unavailable, MF="Micron Technology", MP=MT25QL256ABA1EW9-0SIT, Price=None, SnapEDA_Link=https://www.snapeda.com/parts/MT25QL256ABA1EW9-0SIT/Micron%20Technology%20Inc./view-part/?ref=snap
U2: library part CMP-0254-00385-1, "I2C Real-Time Clock/Supervisor with Trickle Charger and 512 Byte EEPROM, 3.3V, 8-Pin SO, -40 to 85 degC, Pb-Free, Reel", Code_IPC=SOIC127P600-8, Code_JEDEC=MS-012-AA, ComponentLink1Description="Manufacturer URL", ComponentLink1URL=http://www.maxim-ic.com, ComponentLink2Description=Datasheet, ComponentLink2URL=http://datasheets.maxim-ic.com/en/ds/DS1388.pdf, ComponentLink3Description="Package Specification", ComponentLink3URL=http://pdfserv.maxim-ic.com/package_dwgs/21-0041.PDF, DatasheetVersion="rev3, Aug-2010", PackageDescription="8-Pin Small-Outline IC, Narrow (0.15in), 1.27 mm Pitch, SOIC (N), Pb-Free", PackageReference=S8+4, PackageVersion="revC, 2010"
U3: "Multi-protocol Bluetooth Low Energy, ANT and 2.4GHz proprietary system-on-chip", Manufacturer="Nordic Semiconductor", Artikkelnr Noca=N.A., Artikkelnr Simpro=N.A., Footprint Doc=QFN-48, LatestRevisionDate=2014-11-26, Manufacturer Part Number=nRF52832-QFAA, Part Number=nRF52832-QFAA, Pin Count=48, Published=2014-11-26, Publisher="Nordic Semiconductor", Supplier="Nordic Semiconductor"
U4: "Wide-Range 6-Axis MEMS MotionTracking Device for Sports and High Impact Applications", Package="QFN-24 InvenSense", Availability=Unavailable, MF="TDK InvenSense", MP=ICM-20649, Price=None, SnapEDA_Link=https://www.snapeda.com/parts/ICM-20649/TDK%20InvenSense/view-part/?ref=snap
U5: "Accelerometer Triple ±200g 2.5V 16-Pin LGA T/R", Package="LGA-16 Analog Devices", Availability=Unavailable, MF="Analog Devices", MP=ADXL372BCCZ-RL7, Price=None, SnapEDA_Link=https://www.snapeda.com/parts/ADXL372BCCZ-RL7/Analog%20Devices%20Inc./view-part/?ref=snap
U6: library part CMP-0133-00144-1, "Miniature Single-Cell, Fully Integrated Li-Ion, Li-Polymer Charge Management Controller, 4.2V, 5-Pin SOT-23, Industrial Temperature, Tape and Reel", Code_IPC=SOT23-5, DatasheetVersion="revE, Sep-2008", PackageDescription="5-Lead Plastic Small Outline Transistor (OT) [SOT-23]", PackageReference=SOT-23-OT5, PackageVersion="revBB, Aug-2009"
U7: "VCNL4040 Series 3.6 V 200 mm 16 Bit I2C SMT Proximity and Ambient Light Sensor", Package="SMD-8 Vishay", Availability=Unavailable, MF=Vishay, MP=VCNL4040M3OE, Price=None, SnapEDA_Link=https://www.snapeda.com/parts/VCNL4040M3OE/Vishay%20Semiconductor%20Opto%20Division/view-part/?ref=snap
U8: "AP2112 Series 0.6 A 3.3 V Fixed Output SMT LDO Linear Regulator - SOT23-5", Package="SOT-753 Diodes Inc.", Availability=Unavailable, MF="Diodes Inc.", MP=AP2112K-3.3TRG1, Price=None, SnapEDA_Link=https://www.snapeda.com/parts/AP2112K-3.3TRG1/Diodes%20Inc./view-part/?ref=snap
X1: library part XTAL_SMD2016_32MHz_8pF_Epson, "XTAL SMD 2016, 32MHz, Cl=8pF, Total Tol: ±40ppm", Manufacturer="Epson Toyocom", Manufacturer Part Number=Q22FA12800025, Supplier part number=171-2806, Artikkelnr Noca=N.A., Artikkelnr Simpro=N.A., Datasheet=http://www.epsondevice.com/docs/qd/en/DownloadServlet?id=ID000449, Footprint Doc=XTAL_2016, LatestRevisionDate=2014-11-27, Note="XTAL SMD 32.000MHz", Part Number=XTAL_SMD2016_32MHz_8pF_Epson, Pin Count=4, Published=2012-03-09, Publisher="Nordic Semiconductor", Supplier=Farnell
X2: library part CMP-0447-00001-2, "Crystal, 32.768 kHz, 12.5 pF, -40 to 85 degC, SMD Low Profile 3.2 x 1.5 x 0.9 mm, Tape and Reel", Equivalent Series Resistance (R1)="70 Kohm", Frequency="32.768 kHz", Frequency Tolerance @+25degC="+/- 20 ppm", Insulation Resistance (Min)="500 Mohm", Load Capacitance (CL)="12.5 pF", Manufacturer=Abracon, Operating Temperature="-40 to 85 degC", PartNumber=ABS07-32.768KHz-T, Q Value (Type)=30000, Shunt Capacitance (C0)="0.9 to 1.2 pF", ComponentLink1Description="Manufacturer URL", ComponentLink1URL=http://www.abracon.com/, ComponentLink2Description=Datasheet, ComponentLink2URL=http://www.abracon.com/Resonators/ABS07.pdf, ComponentLink3Description="Package Specification", ComponentLink3URL=http://www.abracon.com/Resonators/ABS07.pdf, DatasheetVersion=04.03.13, Drive Level (Type)="0.1 uW", Mounting Technology="Surface Mount", Operation Mode="Flexural Mode (Tuning Fork)", PackageDescription="2-Pin Hand Drawn, Body 3.2x1.5mm, Pitch 2.5mm", PackageReference=ABS07-2, Packing="Tape and Reel"

## Via types
v1: diameter 50, hole 28, Top Layer to Bottom Layer, 77 vias
v2: diameter 25.98, hole 12.99, Top Layer to Bottom Layer, 16 vias

## Nets (pads, with @x,y where several pads share a name; then routed paths per layer and width w, separated by ;. In a path a pad name is that pad's centre, name@x,y a point inside that pad or via, vN(x,y) a via of type N, cw(c..) or ccw(c..) an arc to the next point about the centre after c; other vN are vias at no path point)
+3V3: C1.1 C2.1 C3.1 C4.1 C5.1 C7.1 C8.1 C13.1 C18.1 C21.1 C24.1 C25.1 C26.1 C28.1 P1.1 P9.2 P9.3 R1.2 R2.2 R3.2 R4.2 R5.2 R6.2 R7.2 R8.2 R14.2 R15.2 U1.8 U2.3 U2.8 U3.13 U3.36 U3.48 U4.8 U4.13 U5.1 U5.14 U7.3 U7.4 U8.5 | length 1189.8
  Top Layer w6: U4.8@1872.1,394.28 1881.06,403.24 U4.13@1956.54,403.24
  Top Layer w8: C28.1 796.31,553.26 834.22,591.17 ; 834.12,591.17 U3.36 ; U3.13 1039.83,852.68 1090.79,903.64 ; C13.1@1090.16,498.87 C13.1@1090.16,499.85 ; 1090.88,903.64 1102.63,903.64 C18.1 ; C5.1 C5.1@1872.19,328.91 ; C5.1@1872.1,328.91 U4.8@1872.1,381.78 ; U4.8 U4.8@1872.19,394.28 ; U4.13@1956.54,403.24 2015.64,403.24 C4.1 ; P9.3 2296.22,479.15 2427.32,610.26 C21.1 U8.5 2412.56,737.74 2373.82,776.48 2373.82,836.42 R15.2 R15.2@2426.95,897.43
ACCEL_CS: P5.1 R8.1 U3.10 U5.8 | length 1103.5
  Top Layer w8: U3.10 1434.83,779.97 P5.1@1492.9,838.04 ; P5.1@1493,838.04 P5.1 1858.04,838.04 1913.1,893.1 1913.1,915.25 1915.99,918.14 1913.1,921.03 1913.1,940.58 1871.14,982.54 1783.79,982.54 ; R8.1 1783.79,982.54 ; 1783.7,982.54 1783.79,982.54
ACCEL_INT1: U3.8 U5.11 | length 1070.5
  Top Layer w8: U3.8 1846.53,748.48 1980.72,882.67 1980.72,949.28 1965.99,964.01 U5.11 U5.11@1946.9,964.01
ACCEL_INT2: U3.9 U5.9 | length 960.8
  Top Layer w8: U3.9 1819.4,764.22 1946.9,891.73 U5.9@1946.9,924.64 ; U3.9@1072.41,764.22 U3.9@1072.77,763.87
ACCEL_MISO: P5.2 U3.11 U5.7 | length 928.1
  Top Layer w8: U3.11 1232.47,795.72 1374.79,938.04 P5.2 ; P5.2@1414.26,938.04 P5.2@1453.53,938.04 ; P5.2@1453.63,938.04 P5.2@1453.53,938.04 ; U5.7@1896.31,918.14 1896.31,901.31 1880.54,885.54 1506.03,885.54 P5.2@1453.53,938.04
ACCEL_MOSI: P5.3 U3.12 U5.6 | length 965.8
  Top Layer w8: U3.12 1173.69,811.47 1384.58,1022.36 P5.3@1516.59,1022.36 ; P5.3@1516.68,1022.36 P5.3@1532.37,1038.04 ; P5.3 P5.3@1532.37,1038.04 ; U5.6 1876.72,913.22 1863.5,900 1709.69,900 1571.64,1038.04 P5.3@1532.37,1038.04
ACCEL_SCLK: P5.4 U3.14 U5.4 | length 1035.6
  Top Layer w8: U3.14 1024.08,871.28 1275.16,1122.36 P5.4@1408.48,1122.36 ; P5.4@1408.57,1122.36 1419.26,1133.04 P5.4@1429.94,1122.36 ; P5.4@1429.85,1122.36 1546.86,1122.36 1724.9,944.32 U5.4@1845.72,944.32
CATHODE: U7.2 U7.5 | length 107.5
  Top Layer w8: U7.2 645.32,1284.24 672.88,1256.68 ; 672.79,1256.68 672.79,1228.14 U7.5@700.34,1200.58 ; U7.5 U7.5@700.44,1200.58
COIL1: C22.1 D2.1 D3.2 P8.2@3113.82,1432.43 | length 589.8
  Top Layer w8: D2.1 2963.31,1601.76 D3.2 3113.19,1602.43 3113.82,1601.8 P8.2@3113.82,1432.43
DEC1: C12.1 U3.1 | length 116.8
  Top Layer w8: U3.1 1081.17,638.24 1104.56,614.85 C12.1
DEC2: C16.2 U3.32 | length 71
  Top Layer w8: C16.2@763.22,701.04 U3.32@833.93,701.04 ; U3.32@834.03,701.04 U3.32@834.22,701.23
DEC3: C15.1 U3.33 | length 83.8
  Top Layer w8: C15.1@763,654.85 793.63,685.48 ; 793.72,685.48 U3.33@834.22,685.48
DEC4: C10.2 L5.2 U3.46 | length 275.4
  Top Layer w8: C10.2@1008.34,501.82 1038.22,531.7 ; L5.2@1008.43,399.74 1009.02,399.74 1038.31,429.03 ; C10.2@1008.43,499.85 C10.2@1008.43,501.82 ; U3.46@1008.43,605.76 1008.43,581.91 1038.31,552.03 ; 1038.22,429.03 1038.22,531.7 ; 1038.22,552.03 1038.22,531.7
GND: C1.2 C2.2 C3.2 C4.2 C5.2 C6.2 C7.2 C8.2 C9.1 C10.1 C11.1 C12.2 C13.2 C14.1 C15.2 C16.1 C17.1 C18.2 C19.1 C20.2 C21.2 C22.2 C23.2 C24.2 C25.2 C26.2 C28.2 C29.1 C30.1 D1.1 D4.2 DS2.2 DS3.1 L3.1 P1.3 P1.5 P2.2 P3.2 P4.3 P8.1@3113.82,1332.43 P9.1 Q1.2 R11.1 R13.1 U1.4 U1.9 U2.4 U3.31 U3.45 U3.49 U4.18 U4.20 U5.12 U5.13 U5.16 U6.2 U7.1 U8.2 X1.2 X1.4 | length 3921.8
  Top Layer w6: U4.20@1919.43,490.94 1928.4,481.98 2011.78,481.98
  Top Layer w8: v1(60.48,1695.54) 61.02,1695.01 147.24,1695.01 C26.2 ; P1.3@163.64,1575.54 P1.3 P1.5 ; C8.2@526.14,1198.57 526.14,1172.62 v1(563.22,1135.54) ; C8.2 C7.2@526.23,1243.57 ; v1(568.22,1485.54) 608.22,1485.54 626.27,1503.59 ; v1@568.31,1345.54 579.68,1345.54 v1@587.89,1337.33 ; v1@587.8,1337.33 635.45,1337.33 U7.1@645.23,1327.55 ; X1.4@616.23,508.24 619.02,508.24 664.29,462.96 X1.2 ; 626.36,1503.59 U2.4@626.36,1539.44 ; U7.1 U7.1@645.32,1327.55 ; C15.2@731.6,654.85 C15.2 ; U3.31 U3.49@862.41,716.98 ; U3.49@862.5,716.98 U3.49@864.56,714.92 ; R13.1@953.22,1604.44 v1@1013.22,1544.44 ; C25.2@953.22,1730.72 953.39,1730.54 v1(1013.22,1730.54) ; U3.45 992.59,614.34 U3.49@992.59,634.84 ; v1@1013.31,1540.54 v1@1013.31,1544.44 ; v1@1131.31,857.54 1132.09,858.32 C18.2 ; C13.2@1143.22,500.84 1207,564.62 C12.2 ; C13.2@1143.31,500.84 1143.31,499.85 1154.08,489.09 1154.08,464.78 ; 1153.98,464.78 v1(1188.22,430.54) ; v1@1178.31,1600.54 1212.29,1634.52 ; 1212.19,1634.52 U1.4 ; v1(1358.22,1550.54) 1396.38,1588.7 U1.9 1403.22,1716.36 v1(1403.22,1865.54) 1573.22,1865.54 ; 1573.31,1865.54 1588.31,1850.54 1589.97,1850.54 1613.31,1827.2 C24.2 ; v1@1678.31,1055.54 1711.01,1022.85 ; 1710.91,1022.85 C1.2@1730.32,1022.85 ; C1.2@1730.42,1022.85 C1.2@1734.82,1018.45 ; v1(1793.22,305.54) 1805.12,305.54 1818.07,292.6 1859.51,292.6 C5.2@1866.35,285.76 ; C5.2 C5.2@1866.44,285.76 ; U5.16@1876.62,1009.87 1879.51,1006.98 1879.51,995.24 1891.06,983.69 U5.12@1946.9,983.69 ; C6.2 C6.2@1915.44,285.54 ; C6.2@1915.34,285.54 v1(1968.22,285.54) ; U4.20@1919.43,490.94 U4.20 ; v1(1953.22,1190.54) 1954.45,1189.31 1954.45,1129.68 C3.2 C2.2 1951.29,1064.06 1951.29,1006.27 1948.4,1003.38 1946.9,1003.38 U5.12@1946.9,983.69 ; v1(2008.22,995.54) 1996.85,995.54 1985,983.69 U5.12@1946.9,983.69 ; 2011.78,481.98 v1(2038.22,455.54) 2038.22,444.18 2055.09,427.31 C4.2 ; C21.2 2470.94,616.48 ; DS3.1 v1(2434.82,1236.43) ; C19.1 2514.64,568.53 2470.94,612.23 v1(2470.94,662.54) 2470.94,740.22 2505.86,775.14 U8.2 ; D4.2@2522.97,1601.43 D4.2 2447.82,1526.27 v1(2447.82,1468.43) 2447.82,1409.25 D1.1 ; Q1.2 2594.82,1053.23 v1(2594.82,1127.43) ; U6.2 2706.45,775.43 2672.5,775.43 2667.82,780.11 2667.82,888.43 2684.82,905.43 v1(2687.82,905.43) 2699.18,905.43 2711.85,918.09 2794.19,918.09 2803.97,927.87 R11.1 ; v1(2833.01,1206.62) 2833.16,1206.47 2916.87,1206.47 DS2.2 ; C20.2 2854.4,502.53 v1@2854.4,565 ; C23.2 2912.01,720.24 2917.85,714.39 C9.1 v1(3068.82,714.43) ; v1(3072.82,1683.11) C22.2
  other v1: 570,45 670,45 770,45 870,45 970,45 600,145 770,145 1010,145 410,180 600,245 45,300 145,300 245,300 345,300 450,300 600,345 770,345 945.34,345 45,400 450,400 45,500 245,500 450,500 945,540 2854.82,565.43 45,600 450,600 610,615 670,665 45,700 245,700 450,700 45,800 1131.22,857.54 300,880 400,880 500,880 45,900 45,1000 1678.22,1055.54 45,1100 45,1200.09 45,1300 568.22,1345.54 180,1365 45,1400 45,1500 1013.22,1540.54 1178.22,1600.54
GYRO_CS: P7.4 R7.1 U3.5 U4.22 | length 941.3
  Top Layer w8: U3.5 1325.97,701.23 P7.4 R7.1@1888,578.04 ; U4.22@1887.84,503.44 R7.1@1887.84,578.04
GYRO_INT1: U3.7 U4.12 | length 1492.8
  Top Layer w8: U3.7 2054.67,732.73 2066.85,720.54 v1(2078.22,720.54) ; U4.12@1935.09,377.41 2070.72,377.41 2078.22,384.91 v1(2078.22,520.54)
  Bottom Layer w8: v1(2078.22,520.54) v1(2078.22,720.54)
GYRO_INT2: U3.6 U4.19 | length 1139.3
  Top Layer w8: U3.6 1932.96,716.98 v1(1985.72,664.22) ; U4.19 1935.18,511.7 U4.19@1936.51,513.03 ; U4.19@1936.42,513.03 1962.62,513.03 1973.81,524.22 v1(1985.72,524.22)
  Bottom Layer w8: v1(1985.72,524.22) v1(1985.72,664.22)
GYRO_MISO: P7.2 U3.3 U4.24 | length 998
  Top Layer w8: U3.3 1221.53,669.74 1450.72,440.54 ; P7.2@1449.26,378.04 1450.81,379.6 1450.81,440.54 ; P7.2@1450.72,379.6 1615.2,379.6 1730.91,495.31 U4.24@1856.02,495.31 ; U4.24@1856.11,495.31 1856.44,495.64 U4.24
GYRO_MOSI: P7.1 U3.2 U4.9 | length 1209.2
  Top Layer w8: U3.2 1214.77,653.99 1319.21,549.55 1319.21,374.56 1400.03,293.73 1551.59,293.73 P7.1 ; P7.1@1567.37,278.04 1608.31,278.04 1635.81,250.54 ; 1635.72,250.54 1635.81,250.54 ; U4.9@1887.84,381.78 1887.84,262.84 1875.54,250.54 1635.81,250.54
GYRO_SCLK: P7.3 U3.4 U4.23 | length 922.3
  Top Layer w8: U3.4 1238.28,685.48 1430.03,493.73 1551.59,493.73 P7.3 ; P7.3@1567.37,478.04 P7.3@1606.74,478.04 ; P7.3@1606.64,478.04 1653.63,525.03 1864.41,525.03 ; 1864.5,525.03 1871.86,517.68 1871.86,503.77 U4.23
I2C_SCL: P8.1@928.22,1413.04 R5.1 U2.6 U3.22 U7.8 | length 1256.2
  Top Layer w8: U7.8@700.34,1327.06 U7.8 908.67,1535.38 ; U7.8 700.44,1326.57 U7.8@711.22,1315.79 ; U2.6 854.62,1589.44 908.67,1535.38 ; R5.1@830.5,984.85 R5.1@830.6,984.85 ; U3.22 898.1,872.7 829.61,941.18 829.61,999.61 844.85,1014.85 878.22,1014.85 983.22,1119.85 983.22,1358.04 928.22,1413.04 928.22,1515.84 908.67,1535.38
I2C_SDA: P8.2@928.22,1313.04 R6.1 U2.5 U3.23 U7.7 | length 1183
  Top Layer w8: U7.7@700.34,1285.23 673.22,1312.35 673.22,1428.91 U2.5@783.75,1539.44 ; U7.7@700.44,1285.23 U7.7 U7.7@703.68,1287.98 ; U7.7@703.59,1287.98 U7.7@703.68,1287.98 ; 783.22,960.54 882.35,861.41 U3.23 ; 783.31,960.54 783.31,1002 811.17,1029.85 855.72,1029.85 ; U2.5@783.84,1539.44 U2.5 U2.5@819.28,1539.44 ; 855.81,1029.85 867.01,1041.06 R6.1@867.01,1064.85 ; R6.1@866.92,1064.85 928.22,1126.15 928.22,1313.04 918.23,1313.04 893.16,1287.98 U7.7@703.68,1287.98
IR_INT: R3.1 U3.21 U7.6 | length 578.3
  Top Layer w8: U7.6@700.34,1242.41 U7.6 R3.1@777.98,1242.41 ; R3.1@778.07,1242.41 R3.1 ; R3.1@779.38,1241.01 R3.1 ; v1@857.75,1241.01 R3.1 ; v1@857.84,1241.01 v1@858.31,1240.54 ; v1@893.22,926.98 v1(893.22,938.04) ; v1@893.31,926.98 913.94,906.35 ; U3.21 913.85,906.35
  Bottom Layer w8: v1(858.22,1240.54) 893.22,1205.54 v1(893.22,938.04)
MEM_CS: P6.2 R1.1 U1.1 U3.18 | length 1165.3
  Top Layer w8: U3.18 961.09,986.64 1257.53,1283.08 P6.2@1257.53,1456.41 ; R1.1@1160.93,1785.54 1161.45,1785.03 1244.49,1785.03 U1.1 ; U1.1@1253.27,1784.52 1303.22,1734.57 1303.22,1541.47 ; P6.2 P6.2@1273.22,1511.47 ; P6.2@1273.31,1511.47 1303.31,1541.47
MEM_MISO: P6.4 U1.5 U3.15 | length 1022.3
  Top Layer w8: U3.15 1008.34,880.66 1473.22,1345.54 P6.4 1473.22,1511.47 1547.76,1586.01 ; U1.5@1539.58,1634.52 1547.85,1634.52 1547.85,1586.01
MEM_MOSI: P6.1 U1.2 U3.19 | length 1051.2
  Top Layer w8: U3.19 945.34,997.77 1173.22,1225.64 P6.1 1173.22,1510.54 1283.22,1620.54 1283.22,1704.57 1253.27,1734.52 U1.2
MEM_SCLK: P6.3 U1.6 U3.16 | length 1075.4
  Top Layer w8: U3.16 992.59,927.41 1357.53,1292.36 P6.3@1357.53,1338.3 ; P6.3@1357.63,1338.3 1373.31,1353.99 P6.3@1389,1369.67 ; P6.3@1388.9,1369.67 1388.9,1479.25 1508.39,1598.73 1508.39,1653.42 U1.6@1539.49,1684.52 ; U1.6@1539.58,1684.52 U1.6@1547.85,1684.52
MEM_SPI_HOLD: R4.1 U1.7 U3.17 | length 1197.4